# Altium PCB landslide_pcb.PcbDoc
Units mm, origin at the board's own origin, x right, y up, seen from the top; angles counter-clockwise.
Board outline 152.4 x 101.6 mm, 2 copper layers (Top Layer, Bottom Layer); 72 components, 50 nets, 288 pads, 0 vias.
Unrouted connection lines stored in the file: 172.
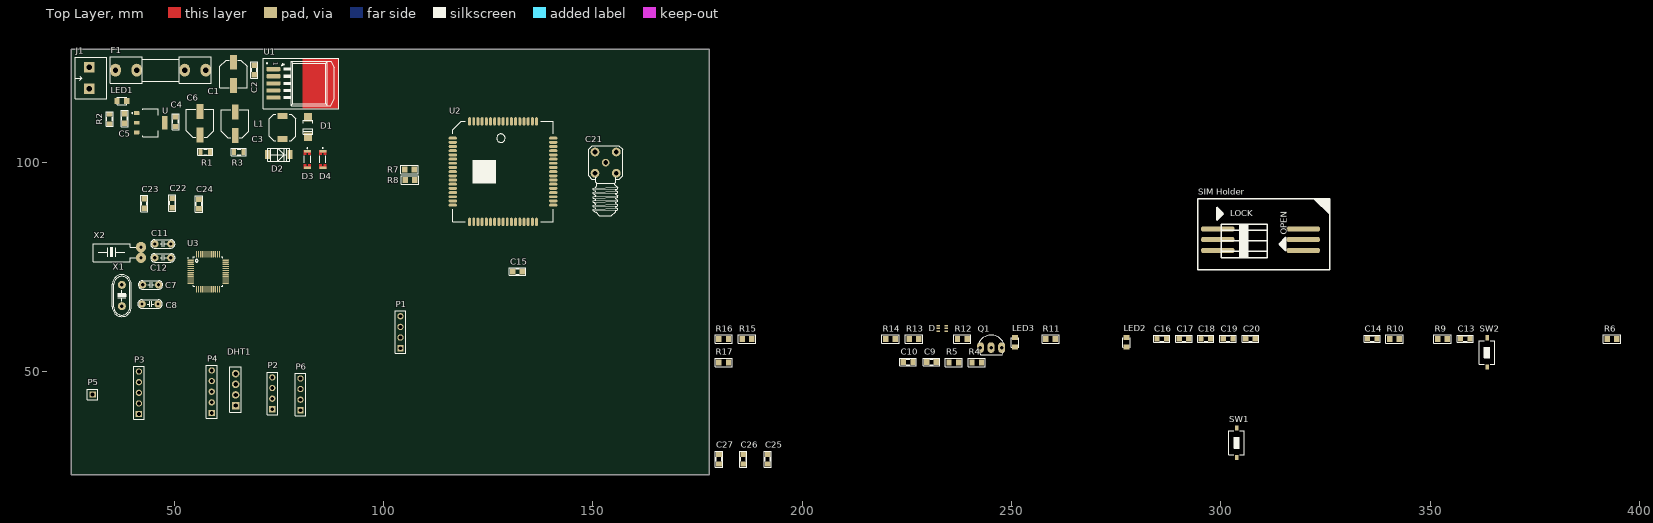
[diagram p0: Top Layer view]
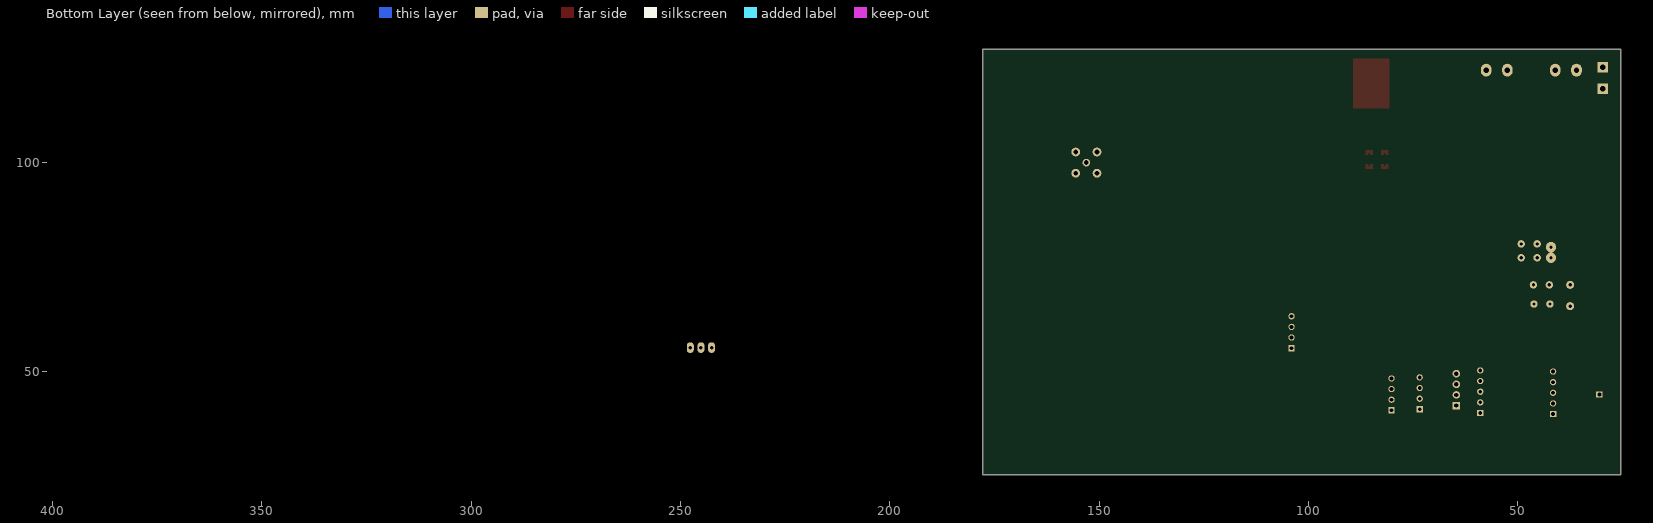
[diagram p1: Bottom Layer view, seen from below]

## Layer stack, top to bottom
Top Solder: solder mask 0.0102, Solder Resist, Dk 3.5
Top Layer: signal copper 0.0356
Dielectric 1: dielectric 0.32, FR-4, Dk 4.8
Bottom Layer: signal copper 0.0356
Bottom Solder: solder mask 0.0102, Solder Resist, Dk 3.5

## Board outline
25.4,25.4 177.8,25.4 177.8,127 25.4,127

## Design rules (kind name [scope] priority, off if disabled: settings)
Clearance [All] p1: gap=0.254 ignorepadtopadclearanceinfootprint=FALSE except(0: Arc-Hole Track-Hole SMDPad-Hole THPad-Hole Via-Hole Fill-Hole Poly-Hole Region-Hole Text-Hole)
PolygonConnect [All] p1: connectstyle=Relief reliefconductorwidth=0.254 reliefentries=4 polygonreliefangle="90 Angle" airgapwidth=0.254
RoutingVias [All] p1: holewidth=0.711 width=1.27 viastyle="Through Hole" minholewidth=0.711 minwidth=1.27 maxholewidth=0.711 maxwidth=1.27
SolderMaskExpansion [All] p1: expansion=0.102 istentingtop=FALSE
Width [All] p1: maxlimit=0.254 minlimit=0.254 preferedwidth=0.254
30 further rules are at their usual default settings.

## Classes and differential pairs
component class power_scm: C1 C2 C3 C4 C5 C6 C22 C23 C24 D1 D2 D3 D4 F1 J1 L1 LED1 R1 R2 R3 U U1
component class MCU_scm: C7 C8 C9 C10 C11 C12 C13 C14 C15 C16 C17 C18 C19 C20 C21 C25 C26 C27 D DHT1 LED2 LED3 P1 P2 P3 P4 P5 P6 Q1 R4 R5 R6 R7 R8 R9 R10 R11 R12 R13 R14 R15 R16 R17 "SIM Holder" SW1 SW2 U2 U3 X1 X2

## Components (designator, comment, footprint, x,y, rotation, side; value= is the part's Value field where it differs from the comment)
C1 "100uH/25V" CAP-ALU-SMD-6.3x7.7x2.2 64.135,121.158 r270 top
C2 "104" SM-0805 69.088,122.047 r270 top value=103
C3 "470uf/16V" CAP-ALU-SMD-6.3x7.7x2.2 64.516,109.22 r90 top
C4 "103" SM-0805 50.292,109.728 r90 top
C5 "103" SM-0805 38.1,110.49 r90 top
C6 "100uH/16V" CAP-ALU-SMD-6.3x7.7x2.2 56.134,109.347 r90 top
C7 "22pF" CN1.5 46.228,70.739 r180 top value=0.01uF
C8 "22pF" CN1.5 46.101,66.167 r180 top value=0.01uF
C9 "104" SM-0805 230.886,52.324 r0 top value=103
C10 "104" SM-0805 225.298,52.324 r0 top value=103
C11 "22pF" CN1.5 49.149,80.518 r180 top value=0.01uF
C12 "22pF" CN1.5 49.149,77.216 r180 top value=0.01uF
C13 "104" SM-0805 358.394,57.912 r0 top value=103
C14 "104" SM-0805 336.169,57.912 r0 top value=103
C15 "22pF" SM-0805 131.953,73.914 r180 top value=103
C16 "104" SM-0805 285.877,57.912 r0 top value=103
C17 "104" SM-0805 291.211,57.912 r0 top value=103
C18 "475" SM-0805 296.418,57.912 r0 top value=103
C19 "103" SM-0805 301.752,57.912 r0 top
C20 "105" SM-0805 307.086,57.912 r0 top value=103
C21 "210111003" SMA-RA 153.035,99.949 r0 top
C22 "104" SM-0805 49.53,90.297 r90 top value=103
C23 "104" SM-0805 42.799,90.17 r90 top value=103
C24 "104" SM-0805 55.88,90.043 r90 top value=103
C25 "104" SM-0805 191.77,29.083 r90 top value=103
C26 "104" SM-0805 185.928,29.083 r90 top value=103
C27 "104" SM-0805 180.086,29.083 r90 top value=103
D "SMF05C" SC70-6 233.426,60.325 r90 top
D1 "1N5822" Diode_SS34 81.915,108.458 r270 top
D2 "" 1N4007_SMD 74.93,101.854 r0 top
D3 "TZM4V3" DIO_LL4148 81.788,100.711 r270 top
D4 "TZM4V3" DIO_LL4148 85.471,100.711 r270 top
DHT1 "DHT22" DHT22 64.643,45.72 r90 top
F1 "F2A" FUSE2 46.736,122.047 r0 top value=Fuse
J1 "KF2" KF2-5.08 29.718,120.142 r90 top
L1 "Inductor" inductor_smd 75.819,108.331 r90 top value=100uH
LED1 "LED" LED-0805-Green 38.608,114.681 r180 top value="LED 3 - 5 ly 2 Colour"
LED2 "LED" LED-0805-Green 277.495,55.88 r90 top value="LED 3 - 5 ly 2 Colour"
LED3 "LED" LED-0805-Green 250.825,55.88 r90 top value="LED 3 - 5 ly 2 Colour"
P1 "Header 4" "HDR 1X4" 104.013,55.626 r90 top
P2 "soil_moisture_ss" "HDR 1X4" 73.406,41.021 r90 top
P3 "ADXL345_p1_ss" "HDR 1X5" 41.529,39.878 r90 top
P4 "ADXL345_p2_ss" "HDR 1X5" 58.928,40.132 r90 top
P5 "RainGauge_ss" "HDR 1X1" 30.48,44.577 r0 top
P6 "SSD1306" "HDR 1X4" 80.137,40.767 r90 top
Q1 "2N222" TO92-123 245.11,55.753 r0 top value=C1815
R1 "0R" RES-SMD-0805 57.404,102.489 r180 top
R2 "100R" RES-SMD-0805 34.544,110.363 r270 top
R3 "0R" RES-SMD-0805 65.405,102.489 r0 top
R4 "47R" R-0805 241.681,52.197 r0 top value=1k
R5 "47R" R-0805 236.22,52.197 r0 top value=1k
R6 "4k7" R-0805 393.446,57.785 r0 top value=1k
R7 "47R" R-0805 106.172,98.298 r180 top value=1k
R8 "47R" R-0805 106.299,95.758 r180 top value=1k
R9 "4k7" R-0805 352.933,57.785 r0 top value=1k
R10 "47R" R-0805 341.503,57.785 r0 top value=1k
R11 "4k7" R-0805 259.334,57.785 r0 top value=1k
R12 "4k7" R-0805 238.252,57.785 r0 top value=1k
R13 "4k7" R-0805 226.695,57.785 r0 top value=1k
R14 "47k" R-0805 221.107,57.785 r0 top value=1k
R15 "4k7" R-0805 186.817,57.785 r0 top value=1k
R16 "4k7" R-0805 181.229,57.785 r0 top value=1k
R17 "100k" R-0805 181.229,52.197 r0 top value=1k
"SIM Holder" "SIMCARD6PIN" SIMCARD6pin 309.421,81.534 r180 top
SW1 "SW" SW1-SMD 303.784,33.02 r90 top value="SW chip 2 pin"
SW2 "SW" SW1-SMD 363.601,54.61 r90 top value="SW chip 2 pin"
U "AMS1117-3.3" SOT229P700X180-4N 44.323,109.474 r270 top
U1 "LM2576" TO263 79.629,119.253 r270 top
U2 "SIM900" SIM900 128.524,97.79 r0 top
U3 "STM32F030CCT6" QFP50P900X900X160-48N 58.05,73.902 r0 top
X1 "8Mhz" XT2 37.465,68.199 r90 top value=4Mhz
X2 "32,768 Khz" XT32k 42.037,77.216 r180 top value=32,768khz

## Footprints (in the part's own frame and the unit in brackets; to place one, negate y for a bottom-side part, rotate by r counter-clockwise, add the part's x,y. Pads: shape width x height; smd on the part's side, far side on the other; paste and mask are expansions set on the pad)
1N4007_SMD [mm]
  rect 1.2x2.1 smd: 1(-2.65,0) 2(2.65,0)
  silkscreen extent -2.67,-1.52 2.67,1.52, body extent -2.65,-1.8 2.65,1.8, height 2.4
CAP-ALU-SMD-6.3x7.7x2.2 [mm]
  rect 3.5x1.6 smd: 1(-2.8,0) 2(2.8,0)
  silkscreen extent -3.3,-3.3 3.3,3.3, body extent -3.65,-3.3 3.65,3.3, height 7.65
CN1.5 [mil]
  round 70 hole 31: 1(0,0) 2(150,0)
  silkscreen extent -40,-40 190,40, body extent -40,-33 190,33, height 235
DHT22 [mm]
  rect 1.8x1.8 hole 1.02: 1(-3.81,0)
  round 1.8 hole 1.02: 2(-1.27,0) 3(1.27,0) 4(3.81,0)
  silkscreen extent -5.46,-1.4 5.46,1.4, body extent -7.86,-5.84 7.61,2.31, height 35.57
DIO_LL4148 [mm]
  rect 0.6x1.65 smd: A(1.95,0) C(-1.95,0)
  Top Layer region: -1.15,0.25 -1.65,0.25 -1.65,-0.25 -1.15,-0.25 -1.15,-0.825 -2.24,-0.825 -2.24,0.825 -1.15,0.825
  Top Layer region: 2.25,-0.825 1.15,-0.825 1.15,-0.25 1.65,-0.25 1.65,0.25 1.15,0.25 1.15,0.825 2.25,0.825
  silkscreen extent -2.8,-0.75 0.83,0.75
Diode_SS34 [mm]
  rect 2x2 smd: 1(-2.35,0) 2(2.35,0)
  silkscreen extent -1.65,-1.1 1.7,1.2, body extent -2.57,-1.82 2.73,1.78, height 2.4
FUSE2 [mil] "De Fuse"
  oval 100x120 hole 50: 1(-425,0) 1(-225,0) 2(225,0) 2(425,0)
  silkscreen extent -475,-125 475,125, body extent -448,-117 459,127, height 378
"HDR 1X1" [mm] "Generic Antenna; 1 Lead"
  rect 1.5x1.5 hole 0.9: 1(0,0)
  silkscreen extent -1.27,-1.27 1.27,1.27, body extent -1.26,-1.27 1.27,1.26, height 8.51
"HDR 1X4" [mm] "Connector; Header; 4 Position"
  rect 1.5x1.5 hole 0.9: 1(0,0)
  round 1.5 hole 0.9: 2(2.54,0) 3(5.08,0) 4(7.62,0)
  silkscreen extent -1.27,-1.27 8.89,1.27, body extent -1.26,-1.27 8.89,1.26, height 8.51
"HDR 1X5" [mm] "Connector; Header; 5 Position"
  rect 1.5x1.5 hole 0.9: 1(0,0)
  round 1.5 hole 0.9: 2(2.54,0) 3(5.08,0) 4(7.62,0) 5(10.16,0)
  silkscreen extent -1.27,-1.27 11.43,1.27, body extent -1.26,-1.27 11.43,1.26, height 8.51
inductor_smd [mm] "SM Inductor; 2 Leads; Body 6.3x6.3mm (LxW)"
  rect 1.5x2.4 smd: 1(-2.75,0) 2(2.75,0)
  silkscreen extent -3.15,-3.15 3.15,3.15, body extent -3.65,-3.65 3.65,3.65, height 4
KF2-5.08 [mm]
  rect 2.5x2.5 hole 1.3: 1(-2.54,0) 2(2.54,0)
  silkscreen extent -4.95,-4.08 4.95,3.43, body extent -5,-4.07 5,3.43, height 10
LED-0805-Green [mil]
  rect 50x55 smd: 1(0,0) 2(90,0)
  silkscreen extent 0,-35 90,35, body extent 5,-25 85,25, height 43
QFP50P900X900X160-48N [mm]
  rrect70% 1.56x0.3 smd: 1(-4.18,2.75) 2(-4.18,2.25) 3(-4.18,1.75) 4(-4.18,1.25) 5(-4.18,0.75) 6(-4.18,0.25) 7(-4.18,-0.25) 8(-4.18,-0.75) 9(-4.18,-1.25) 10(-4.18,-1.75) 11(-4.18,-2.25) 12(-4.18,-2.75) 25(4.18,-2.75) 26(4.18,-2.25) 27(4.18,-1.75) 28(4.18,-1.25) 29(4.18,-0.75) 30(4.18,-0.25) 31(4.18,0.25) 32(4.18,0.75) 33(4.18,1.25) 34(4.18,1.75) 35(4.18,2.25) 36(4.18,2.75)
  rrect70% 0.3x1.56 smd: 13(-2.75,-4.18) 14(-2.25,-4.18) 15(-1.75,-4.18) 16(-1.25,-4.18) 17(-0.75,-4.18) 18(-0.25,-4.18) 19(0.25,-4.18) 20(0.75,-4.18) 21(1.25,-4.18) 22(1.75,-4.18) 23(2.25,-4.18) 24(2.75,-4.18) 37(2.75,4.18) 38(2.25,4.18) 39(1.75,4.18) 40(1.25,4.18) 41(0.75,4.18) 42(0.25,4.18) 43(-0.25,4.18) 44(-0.75,4.18) 45(-1.25,4.18) 46(-1.75,4.18) 47(-2.25,4.18) 48(-2.75,4.18)
  silkscreen extent -4.81,-3.5 3.5,3.5
R-0805 [mil] "Compoment SMD 80x50mil"
  rect 50x55 smd: 1(-45,0) 2(45,0)
  silkscreen extent -81,-39 81,39, body extent -39,-25 39,25, height 31
RES-SMD-0805 [mil]
  rect 39.37x55 smd: 1(-45,0) 2(45,0)
  silkscreen extent -70,-34 70,33, body extent -39,-25 39,25, height 31
SC70-6 [mm]
  rect 0.35x0.8 smd paste-1 mask+0: 1(-0.65,-0.95) 2(0,-0.95) 3(0.65,-0.95) 4(0.65,0.95) 5(0,0.95) 6(-0.65,0.95)
SIM900 [mm]
  oval 2x0.7 smd: 1(-12,8) 2(-12,7) 3(-12,6) 4(-12,5) 5(-12,4) 6(-12,3) 7(-12,2) 8(-12,1) 9(-12,0) 10(-12,-1) 11(-12,-2) 12(-12,-3) 13(-12,-4) 14(-12,-5) 15(-12,-6) 16(-12,-7) 17(-12,-8) 35(12,-8) 36(12,-7) 37(12,-6) 38(12,-5) 39(12,-4) 40(12,-3) 41(12,-2) 42(12,-1) 43(12,0) 44(12,1) 45(12,2) 46(12,3) 47(12,4) 48(12,5) 49(12,6) 50(12,7) 51(12,8)
  oval 0.7x2 smd: 18(-8,-12) 19(-7,-12) 20(-6,-12) 21(-5,-12) 22(-4,-12) 23(-3,-12) 24(-2,-12) 25(-1,-12) 26(0,-12) 27(1,-12) 28(2,-12) 29(3,-12) 30(4,-12) 31(5,-12) 32(6,-12) 33(7,-12) 34(8,-12) 52(8,12) 53(7,12) 54(6,12) 55(5,12) 56(4,12) 57(3,12) 58(2,12) 59(1,12) 60(0,12) 61(-1,12) 62(-2,12) 63(-3,12) 64(-4,12) 65(-5,12) 66(-6,12) 67(-7,12) 68(-8,12)
  silkscreen extent -12,-12 12,12, body extent -12,-12 12,12, height 3.02
SIMCARD6pin [mm]
  oct 8x1.2 smd: 1(10.138,2.54) 2(10.138,0) 3(10.138,-2.54) 4(-10.238,2.54) 5(-10.238,0) 6(-10.238,-2.54)
  silkscreen extent -16.56,-9.79 14.96,7.21, body extent -16.63,-9.87 13.07,7.33, height 2.35
SM-0805 [mil] "Compoment SMD 80x50mil"
  rect 50x55 smd: 1(-45,0) 2(45,0)
  silkscreen extent -77,-34 76,33, body extent -40,-27 40,23, height 24
SMA-RA [mil]
  round 72 hole 45: 1(0,0)
  round 82 hole 45: 2(-100,-100) 3(100,-100) 4(100,100) 5(-100,100)
  silkscreen extent -160,-500 160,160, body extent -136,-457 139,137, height 394
SOT229P700X180-4N [mm]
  rrect15% 0.93x1.31 smd: 1(-2.29,-3.345) 2(0,-3.345) 3(2.29,-3.345)
  rrect15% 3.24x1.31 smd: 4(0,3.345)
  silkscreen extent -3.36,-4.47 3.36,1.86
SW1-SMD [mm]
  rect 1.2x0.8 smd: 1(-3.5,0) 2(3.5,0)
  silkscreen extent -2.82,-1.85 2.82,1.85, body extent -3.05,-1.85 3.05,1.85, height 2.5
TO92-123 [mil] "TO-92"
  oval 66x100 hole 32: 1(-100,0) 2(0,0) 3(100,0)
  silkscreen extent -117,-65 120,118, body extent -109,-66 109,95, height 245
TO263 [mm]
  rrect50% 1x3.4 smd: 1(-3.019,-5.969) 2(-1.319,-5.969) 4(2.081,-5.969) 5(3.781,-5.969)
  rrect50% 1x3.4 smd mask+0: 3(0.381,-5.969)
  Top Layer region: -5.568,1.016 6.432,1.016 6.432,9.65 -5.568,9.65
  silkscreen extent -5.57,-8.35 6.43,9.65, body extent -4.73,-6.84 5.43,7.8, height 4.57
XT2 [mil] "Footpin for Crystal 2 pin"
  round 75 hole 34: 1(-100,0) 2(100,0)
  silkscreen extent -198,-90 195,90, body extent -233,-93 213,90, height 138
XT32k [mil] "Crystal 32k, 2 pin, real timer for DS1307"
  oval 95x100 hole 32: 1(0,0) 2(0,-100)
  silkscreen extent 50,-130 449,36

## Part data
C1 C3 C6: library part CN-ALU-SMD, "Polarized Capacitor (Axial)", LatestRevisionDate=17-Jul-2002, LatestRevisionNote="Re-released for DXP Platform.", PackageReference=POLAR0.8, Published=8-Jun-2000, Publisher="Altium Limited"
C2 C4 C5 C9 C10 C13 C14 C15 C16 C17 C18 C19 C20 C22 C23 C24 C25 C26 C27: library part CM, "Cap SMD"
C7 C8 C11 C12: library part CN1.5, "Cap np 682pF => 104pF"
C21: library part "CON Ant", "CONNECTOR ANTEN", Manufacturer="Würth Elektronik eiSos GmbH", ComponentLink1Description=Manufacturer, ComponentLink1URL=http://www.we-online.de, ComponentLink2Description=Datasheet, ComponentLink2URL=http://katalog.we-online.de/kataloge/eisos/index.php?language=en&pf=Filter_gerade, Created by="Christin Zierenner", Created Date="May 2012", partNo=210111003
D: "12.5V Clamp 8A _8/20Âµs_ Ipp Tvs Diode Surface Mount SC-88/SC70-6/SOT-363", Package="SOT-363 ON Semiconductor", Availability=Unavailable, MF="ON Semiconductor", MP=SMF05C, Price=None, SnapEDA_Link=https://www.snapeda.com/parts/SMF05C/ON%20Semiconductor/view-part/2782704/?ref=snap
D1: library part 1N5819, "Schottky diode"
D2: library part diode, "diode"
D3 D4: library part LL4148, "Diode Standard 100V 200mA Surface Mount SOD-80", Package="SOD-80 Taitron", Availability=Unavailable, MF="ON Semiconductor", MP=LL4148, Price=None, SnapEDA_Link=https://www.snapeda.com/parts/LL4148/ON%20Semiconductor/view-part/2182678/?ref=snap
DHT1: Manufacturer="W¨¹rth Elektronik eiSos GmbH", partNo=613004143121, ComponentLink1 Description=Manufacturer, ComponentLink1URL=http://www.we-online.com, ComponentLink2 Description=Datasheet, ComponentLink2URL=http://katalog.we-online.de/em/datasheet/6130xx143121.pdf, Created by="Karrer Zheng", Created Date="29 March 2013", NoPins=04
F1: library part Fuse, "Fuse", Designed by=VanDungEvn
J1: Manufacturer="Würth Elektronik eiSos GmbH", partNo=691103110002, ComponentLink1 Description=Manufacturer, ComponentLink1URL=http://www.we-online.com, ComponentLink2 Description=Datasheet, ComponentLink2URL=http://katalog.we-online.de/em/datasheet/6911031100xx.pdf, Created by="Karrer Zheng", Created Date="29 October 2013", NoPins=2
LED1 LED2 LED3: library part "LED SMD"
P1: "Header, 4-Pin"
P2 P6: library part "Header 4", "Header, 4-Pin"
P3 P4: library part "Header 5", "Header, 5-Pin"
P5: library part "Header 1", "Header, 1-Pin"
Q1: "NPN 600mW, ECB", Creat by=MT-TECH.VN
R1 R2 R3: library part Res-SMD, "Resistor", Manufacturer="Generic Components", Class=Passive, Published=08/06/2000, Publisher="Altium Hobart Technology Centre"
R4 R5 R6 R7 R8 R9 R10 R11 R12 R13 R14 R15 R16 R17: library part resistor, "dien tro"
SW1 SW2: library part SW2, "Switch button 2 pin"
U: "Sot223/Pkg 1-Amp 3.3-Volt Low Drop Out Voltage Regulatator", Package=None, Availability=Unavailable, MF="Advanced Monolithic Systems", MP=AMS1117-3.3, Price=None, SnapEDA_Link=https://www.snapeda.com/parts/AMS1117-3.3/Advanced%20Monolithic%20Systems/view-part/53450/?ref=snap
U1: Max Input Voltage="12 V", Max Output Current="3 (6.0 peak) A", Max Output Voltage=mV, Temperature Range="-40 to +125 degC", Category=IC-Power, Min Input Voltage=mV, Min Output Voltage=mV, Mounting Technology="Surface Mount", Status=Unreleased, Supply Voltage=mV
U3: "ARMÂ® CortexÂ®-M0 STM32F0 Microcontroller IC 32-Bit 48MHz 256KB _256K x 8_ FLASH 48-LQFP _7x7_", Package="LQFP-48 STMicroelectronics", Digi-Key_Part_Number=497-17332-2-ND, Digi-Key_Purchase_URL=https://www.digikey.com.ar/product-detail/en/stmicroelectronics/STM32F030CCT6TR/497-17332-2-ND/6833532?utm_source=snapeda&utm_medium=aggregator&utm_campaign=symbol, MF=STMicroelectronics, MP=STM32F030CCT6, SnapEDA_Link=https://www.snapeda.com/parts/STM32F030CCT6/STMicroelectronics/view-part/447161/?ref=snap
X1: library part XT2, "Crystal For all Crystal 2pin."
X2: library part XT32k, "Crystal 32,768kHz for timer real"
L1: Published=8-Jun-2000, Publisher="Altium Limited", Revision="July-2002: Re-released for DXP Platform."

## Nets (pads, with @x,y where several pads share a name; then routed paths per layer and width w, separated by ;. In a path a pad name is that pad's centre, name@x,y a point inside that pad or via, vN(x,y) a via of type N, cw(c..) or ccw(c..) an arc to the next point about the centre after c; other vN are vias at no path point)
3V3: C16.2 C17.2 C18.2 C19.2 C20.2 DHT1.1 P1.4 P2.1 P4.2 P6.2 R13.1 R15.1 R16.1 U3.1 U3.9 U3.24 U3.36 U3.48
+3V3: C5.1 LED1.1 U.2
+5: C3.1 L1.2 R1.1 R3.1 R9.2 U1.4
ADXL_CS: P4.5 U3.14
ADXL_IN1: P3.4 U3.20
ADXL_SCL: P3.1 U3.15
ADXL_SDA: P3.2 U3.17
ADXL_SDO: P3.3 U3.16
CA1: "SIM Holder.6" C14.1 D.1 U2.31
CA3: "SIM Holder.3" D.4 U2.32
CA4: "SIM Holder.2" D.5 U2.33
CA5: "SIM Holder.1" C15.1 D.6 U2.30
data_DHT22: DHT1.2 R13.2 U3.18
GND: C1.2 C2.2 C3.2 C4.2 C5.2 C6.2 C22.1 C23.1 C24.1 D1.1 D3.A D4.A J1.1 R2.2 U1.3 U1.5 U.1
GND_MCU: C7.1 C8.1 C11.1 C12.1 C13.2 C16.1 C17.1 C18.1 C19.1 C20.1 C22.2 C23.2 C24.2 C25.2 C26.2 C27.2 DHT1.4 P1.1 P2.2 P4.3 P6.1 R6.2 SW1.2 U3.8 U3.23 U3.35 U3.47
GND_SIM: "SIM Holder.4" C9.1 C10.1 C14.2 C15.2 C21.2 C21.3 C21.4 C21.5 C25.1 C26.1 C27.1 D.2 LED2.2 Q1.1 R14.2 SW2.2 U2.17 U2.18 U2.29 U2.39 U2.45 U2.46 U2.53 U2.54 U2.58 U2.59 U2.61 U2.62 U2.63 U2.64 U2.65
GSM_ANT: C21.1 R5.1
NetC4_1: C4.1 C6.1 R1.2 U.3
NetC9_2: C9.2 R4.2 U2.60
NetC10_2: C10.2 R4.1 R5.2
NetD1_2: D1.2 L1.1 U1.2
NetD2_1: D2.1 R3.2
NetF1_1: F1.1 J1.2
NetLED1_2: LED1.2 R2.1
NetLED2_1: LED2.1 R10.1
NetLED3_2: LED3.2 R11.2
NETLIGHT: R12.2 U2.52
NetQ1_2: Q1.2 R12.1 R14.1
NetQ1_3: Q1.3 R11.1
NetR6_1: R6.1 U3.44
NetR7_1: R7.1 U2.9
NetR8_1: R8.1 U2.10
NetR17_2: R17.2 U2.16
NRST: C13.1 R9.1 SW1.1 U3.7
OSC32_IN: C11.2 U3.3 X2.2
OSC32_OUT: C12.2 U3.4 X2.1
OSC_IN: C7.2 U3.5 X1.2
OSC_OUT: C8.2 U3.6 X1.1
PWRKEY: SW2.1 U2.1
Rain_pulse: P5.1 U3.13
SIM_RXD: R7.2 U3.30
SIM_TXD: R8.2 U3.31
soil_AO: P2.4 U3.19
SSD1306_SCL: P6.3 R15.2 U3.21
SSD1306_SDA: P6.4 R16.2 U3.22
STATUS: R10.2 U2.66
SWCLK: P1.3 U3.37
SWDIO: P1.2 U3.34
VGSM: D2.2 D3.C D4.C LED3.1 R17.1 U2.55 U2.56 U2.57
Vin: C1.1 C2.1 F1.2 U1.1
pads on no net: "SIM Holder.5" D.3 DHT1.3 P2.3 P3.5 P4.1 P4.4 U2.2 U2.3 U2.4 U2.5 U2.6 U2.7 U2.8 U2.11 U2.12 U2.13 U2.14 U2.15 U2.19 U2.20 U2.21 U2.22 U2.23 U2.24 U2.25 U2.26 U2.27 U2.28 U2.34 U2.35 U2.36 U2.37 U2.38 U2.40 U2.41 U2.42 U2.43 U2.44 U2.47 U2.48 U2.49 U2.50 U2.51 U2.67 U2.68 U3.2 U3.10 U3.11 U3.12 U3.25 U3.26 U3.27 U3.28 U3.29 U3.32 U3.33 U3.38 U3.39 U3.40 U3.41 U3.42 U3.43 U3.45 U3.46 U.4

## Text inside footprints (layer, text, board x,y; h text height)
"SIM Holder": Top Overlay "OPEN" at 315.783,82.745 h1.52 r90; Top Overlay "LOCK" at 302.283,87.145 h1.52
U1: Top Overlay "1" at 73.711,123.898 h1 r270